# EAGLE board M_3x4._v1brd (EAGLE 9.6.2)
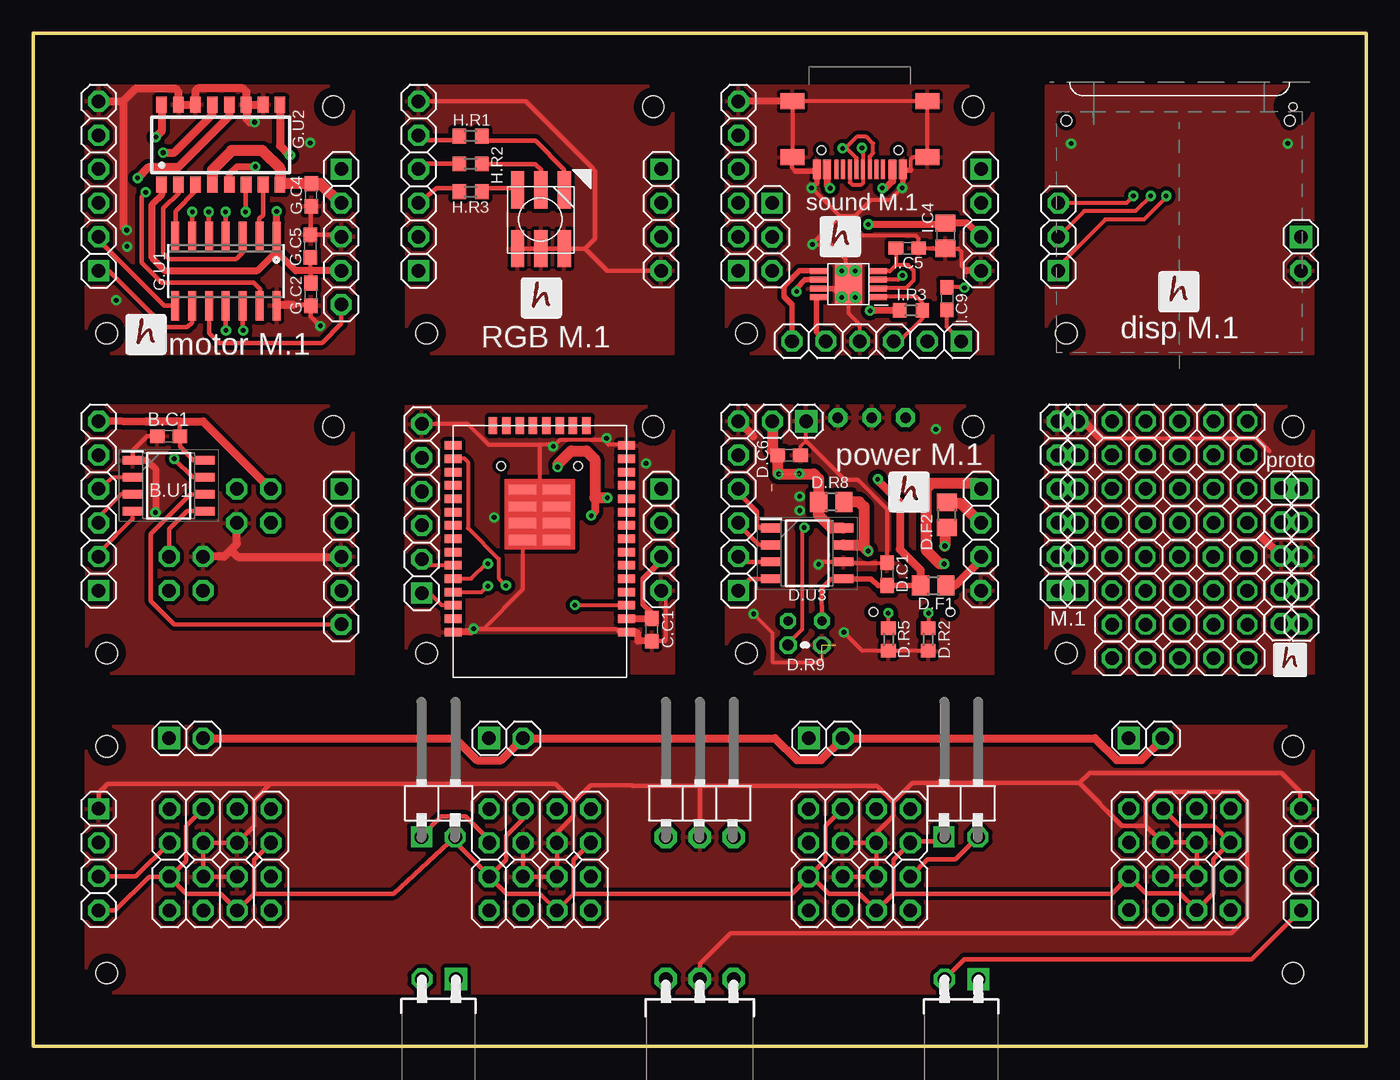
[diagram p0: board, top side]
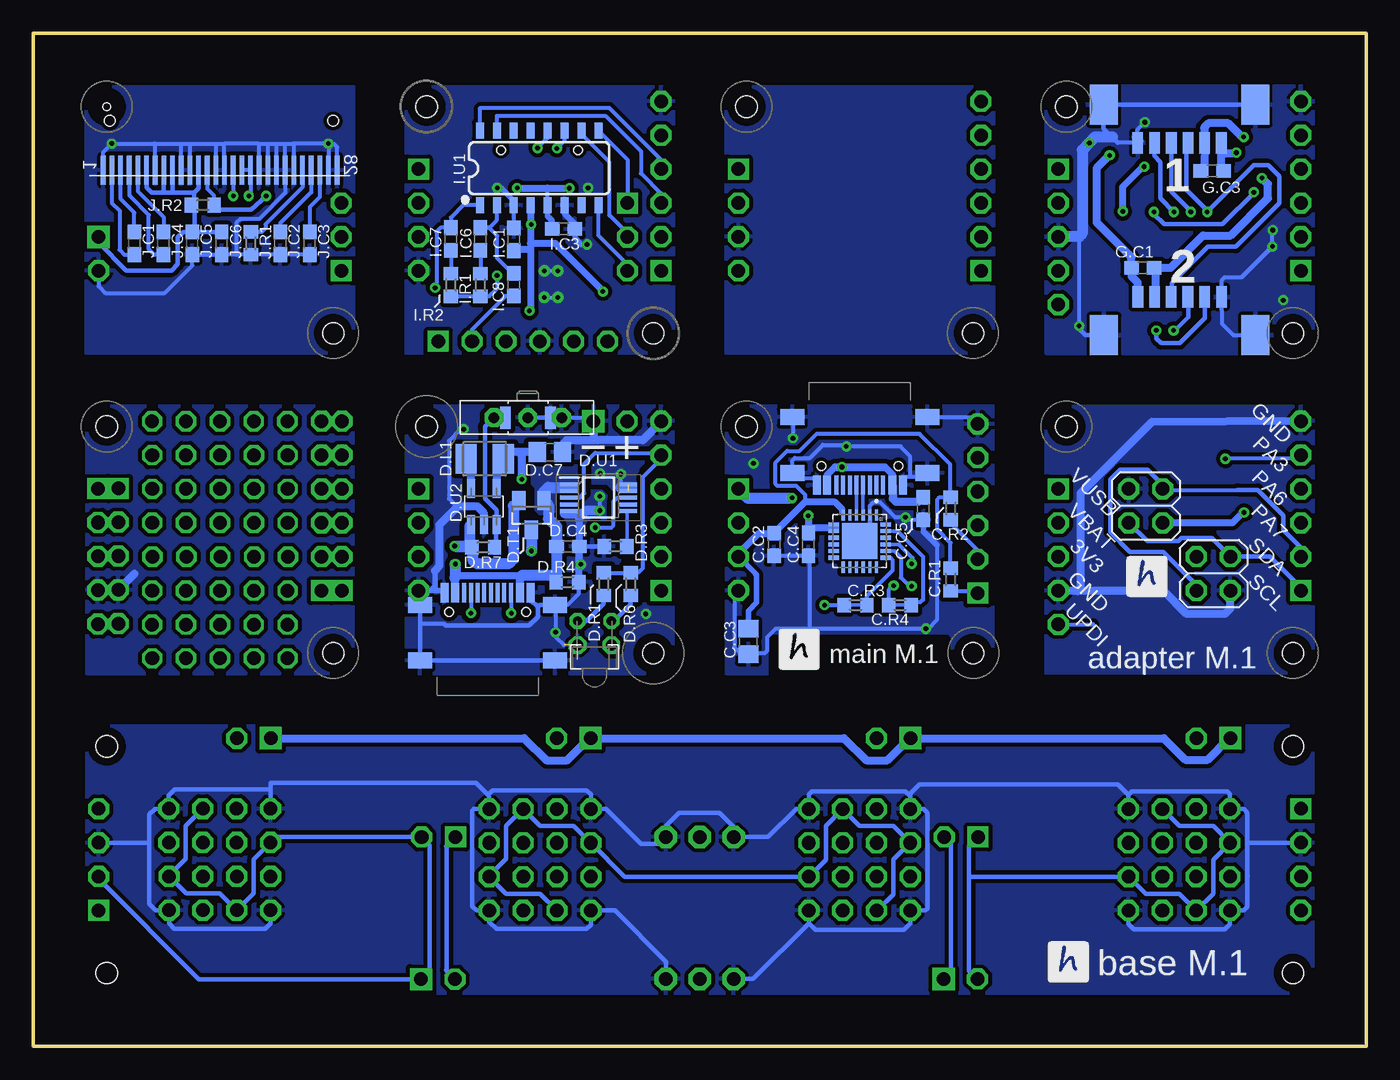
[diagram p1: board, bottom side, seen from below]

Size 100 x 76 mm. Coordinates in mm from the lower left corner, seen from the top.
Outline: 0,0 100,0 100,76 0,76 0,0
Copper layers (1*16): Top 0.035mm / dielectric 1.5mm / Bottom 0.035mm
Design rules "default *": minimum track width 10mil, minimum drill 0.35mm, track to track 6mil, track to pad 6mil, pad to pad 6mil, via to via 6mil, smd to smd 6mil, copper to edge 0mil, drill to drill 15mil, minimum pad ring 10mil, minimum via ring 8mil, stop-mask expansion 4mil, vias tented up to drill 0mil, thermal gap 10mil
Holes 1.6 mm at 94.5,5.5 94.5,22.5 5.5,22.5 5.5,5.5 5.5,29.5 22.5,46.5 94.5,46.5 77.5,29.5 5.5,53.5 22.5,70.5 29.5,53.5 46.5,70.5 53.5,53.5 70.5,70.5 77.5,53.5 29.5,29.5 46.5,46.5 53.5,29.5 70.5,46.5
Holes 0.6 mm at 94.5,70.5
tRestrict: area 4.5,52.5 to 6.5,54.5; area 21.5,69.5 to 23.5,71.5; area 28.5,52.5 to 30.5,54.5; area 45.5,69.5 to 47.5,71.5; area 52.5,52.5 to 54.5,54.5; area 69.5,69.5 to 71.5,71.5; area 76.5,52.5 to 78.5,54.5; area 93.5,69.5 to 95.5,71.5; area 4.5,28.5 to 6.5,30.5; area 21.5,45.5 to 23.5,47.5; area 76.5,28.5 to 78.5,30.5; area 93.5,45.5 to 95.5,47.5; 8 more areas
bRestrict: area 4.5,52.5 to 6.5,54.5; area 21.5,69.5 to 23.5,71.5; area 28.5,52.5 to 30.5,54.5; area 45.5,69.5 to 47.5,71.5; area 52.5,52.5 to 54.5,54.5; area 69.5,69.5 to 71.5,71.5; area 76.5,52.5 to 78.5,54.5; area 93.5,69.5 to 95.5,71.5; area 4.5,28.5 to 6.5,30.5; area 21.5,45.5 to 23.5,47.5; area 76.5,28.5 to 78.5,30.5; area 93.5,45.5 to 95.5,47.5; 8 more areas

## Footprints (pad centres in the part's own frame; a part is rotated, then mirrored left to right if it is on the bottom)
2X04 = drill 1.016 pad 1.575 octagon: 1 -3.81,-1.27; 2 -3.81,1.27; 3 -1.27,-1.27; 4 -1.27,1.27; 5 1.27,-1.27; 6 1.27,1.27; 7 3.81,-1.27; 8 3.81,1.27
1X02/90 = drill 1.016 pad 1.575 square: 1 -1.27,-3.81 | drill 1.016 pad 1.575 octagon: 2 1.27,-3.81
1X03/90 = drill 1.016 pad 1.676 octagon: 1 -2.54,-3.81; 2 0,-3.81; 3 2.54,-3.81
1X03/90F = drill 1.016 pad 1.676 octagon: 1 -2.54,0; 2 0,0; 3 2.54,0
1X02/90F = drill 1.016 pad 1.676 square: 1 -1.31,0 | drill 1.016 pad 1.575 octagon: 2 1.23,0
1X04 = drill 1.016 pad 1.575 square: 1 -3.81,0 | drill 1.016 pad 1.575 octagon: 2 -1.27,0; 3 1.27,0; 4 3.81,0
C0603 = smd 1.1 x 1: 1 -0.85,0; 2 0.85,0
1X06 = drill 1.016 pad 1.575 square: 1 -6.35,0 | drill 1.016 pad 1.575 octagon: 2 -3.81,0; 3 -1.27,0; 4 1.27,0; 5 3.81,0; 6 6.35,0
2X02 = drill 1.016 pad 1.575 octagon: 1 -1.27,-1.27; 2 -1.27,1.27; 3 1.27,-1.27; 4 1.27,1.27
1X05 = drill 1.016 pad 1.575 square: 1 -5.08,0 | drill 1.016 pad 1.575 octagon: 2 -2.54,0; 3 0,0; 4 2.54,0; 5 5.08,0
SOIC127P600X175-8N = smd 1.5 x 0.65: 1 -2.7,1.905; 2 -2.7,0.635; 3 -2.7,-0.635; 4 -2.7,-1.905; 5 2.7,-1.905; 6 2.7,-0.635; 7 2.7,0.635; 8 2.7,1.905
C0805 = smd 1.3 x 1.5: 1 -0.95,0; 2 0.95,0
R0603 = smd 1 x 1.1: 1 -0.85,0; 2 0.85,0
TTGO-MICRO-32 = smd 1.27 x 0.635: 3V3 -6.5,5; EN -6.5,4; GND1 -6.5,6; GND2 -6.5,-8; GND3 6.5,6; IO0 6.5,-7; IO2 6.5,-8; IO4 6.5,-6; IO5 6.5,-3; IO12 -6.5,-7; IO14 -6.5,-6; IO16 6.5,-5; IO17 6.5,-4; IO18 6.5,-2; IO19 6.5,-1; IO21 6.5,1; IO22 6.5,4; IO23 6.5,5; IO25 -6.5,-3; IO26 -6.5,-4; IO27 -6.5,-5; IO32 -6.5,-1; IO33 -6.5,-2; IO34 -6.5,1; IO35 -6.5,0; NC 6.5,0; RXD0 6.5,2; TXD0 6.5,3; VN -6.5,2; VP -6.5,3 | smd 0.635 x 1.27: CLK 0.5,-9.5; CMD -0.5,-9.5; IO13 -3.5,-9.5; IO15 3.5,-9.5; SD0 1.5,-9.5; SD1 2.5,-9.5; SD2 -2.5,-9.5; SD3 -1.5,-9.5 | smd 2.032 x 0.762: GND4 -1.27,-0.889; GND5 1.27,-0.889; GND6 -1.27,-2.159; GND7 1.27,-2.159; GND8 -1.27,-3.429; GND9 -1.27,-4.699; GND10 1.27,-3.429; GND11 1.27,-4.699
LED_1.8 = drill 0.7 octagon: 1 -1.27,-0.4; 2 1.27,-0.4
R0805 = smd 1.3 x 1.5: 1 -0.95,0; 2 0.95,0
L3230M = smd 1.6 x 2.2: 1 -1.4,0; 2 1.4,0
1X02 = drill 1.016 pad 1.676 square: 1 -1.27,0 | drill 1.016 pad 1.575 octagon: 2 1.27,0
SWITCH = drill 0.8 pad 1.422 octagon: P$1 -2.54,0; P$2 0,0; P$3 2.54,0 | smd 0.8 x 1.7: P$4 -1.7,0; P$5 1.7,0
THERM = drill 0.813 octagon: 1 -1.27,0; 2 1.27,0
SOT23 = smd 1 x 1.4: D 0,1.1; G -0.95,-1.1; S 0.95,-1.1
SOP50P490X110-10N = smd 1.4 x 0.3: 1 -2.2,1; 2 -2.2,0.5; 3 -2.2,0; 4 -2.2,-0.5; 5 -2.2,-1; 6 2.2,-1; 7 2.2,-0.5; 8 2.2,0; 9 2.2,0.5; 10 2.2,1
SOT32-5 = smd 0.6 x 1.4: BP 0.95,1.35; GND 0,-1.35; SHDN 0.95,-1.35; VIN -0.95,-1.35; VOUT -0.95,1.35
SOIC127P600X175-8N' = smd 1.528 x 0.65: 1 -2.711,1.905; 2 -2.711,0.635; 3 -2.711,-0.635; 4 -2.711,-1.905; 5 2.711,-1.905; 6 2.711,-0.635; 7 2.711,0.635; 8 2.711,1.905
A1250WR-6 = smd 0.8 x 1.6: 1 -3.128,2.54; 2 -1.878,2.54; 3 -0.628,2.54; 4 0.622,2.54; 5 1.872,2.54; 6 3.142,2.54 | smd 2.1 x 3: $1 -5.678,-0.34; $2 5.682,-0.34
SO14 = smd 0.6 x 2.2: 1 -3.81,-2.6; 2 -2.54,-2.6; 3 -1.27,-2.6; 4 0,-2.6; 5 1.27,-2.6; 6 2.54,-2.6; 7 3.81,-2.6; 8 3.81,2.6; 9 2.54,2.6; 10 1.27,2.6; 11 0,2.6; 12 -1.27,2.6; 13 -2.54,2.6; 14 -3.81,2.6
SOP16 = smd 0.8 x 1.2: 1 -4.445,-3; 2 -3.175,-3; 3 -1.905,-3; 4 -0.635,-3; 5 0.635,-3; 6 1.905,-3; 7 3.175,-3; 8 4.445,-3; 9 4.445,3; 10 3.175,3; 11 1.905,3; 12 0.635,3; 13 -0.635,3; 14 -1.905,3; 15 -3.175,3; 16 -4.445,3
RGB_WW-FCE50TC-Q1 = smd 1 x 2.8: 1 -1.778,-2.286; 2 -0.028,-2.286; 3 1.722,-2.286; 4 -1.778,2.114; 5 -0.028,2.114; 6 1.722,2.114
1X03 = drill 1.016 pad 1.575 square: 1 -2.54,0 | drill 1.016 pad 1.575 octagon: 2 0,0; 3 2.54,0
SSD_1306_STM32_OLED = smd 0.35 x 2.2 bottom: P$1 0,-0.4; P$2 0.65,-0.4; P$3 1.3,-0.4; P$4 1.95,-0.4; P$5 2.6,-0.4; P$6 3.25,-0.4; P$7 3.9,-0.4; P$8 4.55,-0.4; P$9 5.2,-0.4; P$10 5.85,-0.4; P$11 6.5,-0.4; P$12 7.15,-0.4; P$13 7.8,-0.4; P$14 8.45,-0.4; P$15 9.1,-0.4; P$16 9.75,-0.4; P$17 10.4,-0.4; P$18 11.05,-0.4; P$19 11.7,-0.4; P$20 12.35,-0.4; P$21 13,-0.4; P$22 13.65,-0.4; P$23 14.3,-0.4; P$24 14.95,-0.4; P$25 15.6,-0.4; P$26 16.25,-0.4; P$27 16.9,-0.4; P$28 17.55,-0.4 | hole 0.8: 0.5,-4.1; 17.25,-4.1
SO16 = smd 0.6 x 1.2: 1 -4.445,-2.8; 2 -3.175,-2.8; 3 -1.905,-2.8; 4 -0.635,-2.8; 5 0.635,-2.8; 6 1.905,-2.8; 7 3.175,-2.8; 8 4.445,-2.8; 9 4.445,2.8; 10 3.175,2.8; 11 1.905,2.8; 12 0.635,2.8; 13 -0.635,2.8; 14 -1.905,2.8; 15 -3.175,2.8; 16 -4.445,2.8
MSOP-POWERPAD-8 = smd 1.4 x 0.45: 1 -2.184,0.959; 2 -2.184,0.309; 3 -2.184,-0.341; 4 -2.184,-0.991; 5 2.216,-0.991; 6 2.216,-0.341; 7 2.216,0.309; 8 2.216,0.959 | smd 2 x 3: 9 0.016,-0.016 | drill 0.35: P$10 -0.484,-1.016; P$11 0.516,-1.016; P$12 0.516,0.984; P$13 -0.484,0.984
USB-C = smd 0.6 x 1.45: A1B12 -3.235,3.825; A4B9 -2.46,3.825; B1A12 3.215,3.825; B4A9 2.44,3.825 | smd 0.3 x 1.45: A5 -1.26,3.825; A6 -0.26,3.825; A7 0.24,3.825; A8 1.24,3.825; B5 1.74,3.825; B6 0.74,3.825; B7 -0.76,3.825; B8 -1.76,3.825 | smd 1.8 x 1.2: SH1 -5.08,2.91; SH2 -5.08,-1.27; SH3 5.06,-1.27; SH4 5.06,2.91 | hole 0.65: 2.88,2.38; -2.9,2.38
QFN50P400X400X80-25N = smd 0.81 x 0.26: 1 -1.955,1.25; 2 -1.955,0.75; 3 -1.955,0.25; 4 -1.955,-0.25; 5 -1.955,-0.75; 6 -1.955,-1.25; 13 1.955,-1.25; 14 1.955,-0.75; 15 1.955,-0.25; 16 1.955,0.25; 17 1.955,0.75; 18 1.955,1.25 | smd 0.26 x 0.81: 7 -1.25,-1.955; 8 -0.75,-1.955; 9 -0.25,-1.955; 10 0.25,-1.955; 11 0.75,-1.955; 12 1.25,-1.955; 19 1.25,1.955; 20 0.75,1.955; 21 0.25,1.955; 22 -0.25,1.955; 23 -0.75,1.955; 24 -1.25,1.955 | smd 2.68 x 2.68: 25 0,0
1X5_AUTO = drill 1.016 octagon: 1 -5.08,0; 2 -2.54,0; 3 0,0; 4 2.54,0; 5 5.08,0

## Placement (x,y rotation side)
A.J1  [2X04]  14.02,16.53 180 top
A.J2  [2X04]  14.02,11.45 180 top
A.J3  [2X04]  38.01,16.53 180 top
A.J4  [2X04]  38.01,11.45 180 top
A.J5  [2X04]  61.98,16.53 180 top
A.J6  [2X04]  61.98,11.45 180 top
A.J7  [1X02/90]  30.39,19.5 0 top
A.J8  [1X03/90]  50,19.5 0 top
A.J9  [1X03/90F]  50,5.04 180 top
A.J10  [1X02/90F]  30.39,5.04 180 top
A.J11  [2X04]  86.01,11.47 0 top
A.J12  [2X04]  86.02,16.55 0 top
A.J13  [1X02/90F]  69.6,5.02 180 top
A.J14  [1X02/90]  69.6,19.5 0 top
A.J15  [1X04]  4.9,14 270 top
A.J16  [1X04]  95.1,14 90 top
B.C1  100n  [C0603]  10.15,45.76 0 top
B.J2  [1X06]  4.9,40.54 90 top
B.J4  [2X02]  16.54,40.54 270 bottom
B.J5  [1X05]  23.1,36.73 270 top
B.U1  AT412  [SOIC127P600X175-8N]  10.16,42.05 0 top
C.C1  100n  [C0603]  46.41,31.24 270 top
C.C2  100n  [C0603]  44.42,37.65 270 bottom
C.C3  22u  [C0805]  46.35,30.36 270 bottom
C.C4  100n  [C0603]  41.85,37.66 90 bottom
C.C5  10u  [C0603]  33.23,40.34 90 bottom
C.J2  [1X06]  29.14,40.35 90 top
C.R1  2k2  [R0603]  31.18,35.01 90 bottom
C.R2  2k2  [R0603]  31.16,40.34 90 bottom
C.R3  0  [R0603]  38.31,33.1 0 bottom
C.R4  0  [R0603]  34.98,33.1 180 bottom
C.U1  TTGO-MICRO-32  [TTGO-MICRO-32]  37.99,37.08 180 top
D.C1  100n  [C0603]  64.05,35.42 270 top
D.C4  4u7  [C0603]  59.89,37.5 180 bottom
D.C6  4u7  [C0603]  56.71,44.35 180 top
D.C7  22u  [C0805]  61.24,44.58 180 bottom
D.D1  LED_1.8  [LED_1.8]  57.9,31.51 180 bottom
D.F1  [R0805]  67.52,34.58 0 top
D.F2  [R0805]  68.53,39.87 90 top
D.J2  [1X06]  52.9,40.54 90 top
D.J3  [1X04]  71.1,38 270 top
D.L1  2u2  [L3230M]  66.13,44.09 0 bottom
D.LIPOL  [1X02]  56.71,46.89 180 top
D.ON/OFF/RESET  SWITCH  [SWITCH]  62.9,47.16 0 bottom
D.R1  100k  [R0603]  57.21,34.67 90 bottom
D.R2  5k1  [R0603]  67.15,30.52 270 top
D.R3  1k  [R0603]  56.32,37.5 0 bottom
D.R4  100k  [R0603]  59.93,34.82 180 bottom
D.R5  5k1  [R0603]  64.16,30.52 270 top
D.R6  2k2  [R0603]  55.18,34.66 270 bottom
D.R7  100k  [R0603]  66.25,37.43 0 bottom
D.R8  0.1  [R0805]  59.87,40.84 180 top
D.R9  TERM_10K  [THERM]  57.9,30.1 180 top
D.T1  FDV  [SOT23]  62.63,39.84 180 bottom
D.U1  MCP73833-AMI_UN  [SOP50P490X110-10N]  57.6,41.16 0 bottom
D.U2  LM3671_3.3  [SOT32-5]  66.19,40.5 0 bottom
D.U3  INA219AIDR  [SOIC127P600X175-8N']  58.05,36.97 0 top
G.C1  100n  [C0603]  16.76,58.41 180 bottom
G.C2  100n  [C0603]  20.82,56.4 90 top
G.C3  100n  [C0603]  11.55,65.67 0 bottom
G.C4  4u7  [C0603]  20.86,63.87 90 top
G.C5  4u7  [C0603]  20.79,60.04 270 top
G.J1  [1X06]  4.9,64.54 90 top
G.J2  [1X05]  23.1,60.73 270 top
G.J3  A1250WR-6  [A1250WR-6]  14,53.68 0 bottom
G.MOTO1  A1250WR-6  [A1250WR-6]  14,70.32 180 bottom
G.U1  AT414  [SO14]  14.45,58.15 180 top
G.U2  MX1508  [SOP16]  14.07,67.63 0 top
H.D1  RGB_WW-FCE50TC-Q1  [RGB_WW-FCE50TC-Q1]  38.05,61.95 180 top
H.J2  [1X06]  28.9,64.54 90 top
H.J4  [1X06]  63.27,52.9 180 top
H.R1  82  [R0603]  32.8,68.28 0 top
H.R2  82  [R0603]  32.8,66.2 0 top
H.R3  82  [R0603]  32.8,64.11 0 top
I.C1  100n  [C0603]  63.95,60.55 90 bottom
I.C3  1u  [C0603]  60.22,61.31 0 bottom
I.C4  10u (22u)  [C0805]  68.44,60.81 90 top
I.C5  100n  [C0603]  65.57,59.88 180 top
I.C6  100n  [C0603]  66.46,60.57 270 bottom
I.C7  100n  [C0603]  68.67,60.57 270 bottom
I.C8  100n  [C0603]  63.95,57.14 270 bottom
I.C9  100n  [C0603]  68.54,56.1 270 top
I.J1  [1X03]  55.44,60.72 270 top
I.J2  [1X06]  52.9,64.54 90 top
I.J3  [1X04]  71.1,62 270 top
I.J4  SSD_1306_STM32_OLED  [SSD_1306_STM32_OLED]  94.75,65.33 180 top
I.J5  [1X02]  95.1,59.46 270 top
I.R1  100k  [R0603]  66.46,57.11 270 bottom
I.R2  100k  [R0603]  68.67,57.11 270 bottom
I.R3  10k  [R0603]  65.85,55.21 180 top
I.U1  WT2003S  [SO16]  62.05,65.89 0 bottom
I.U2  TPA6211  [MSOP-POWERPAD-8]  61.18,57.16 180 top
I.USB  USB-C  [USB-C]  62,69.62 180 top
J.C1  1u  [C0603]  92.42,60.24 270 bottom
J.C2  2u2  [C0603]  81.47,60.24 90 bottom
J.C3  2u  [C0603]  79.26,60.24 90 bottom
J.C4  1u  [C0603]  90.23,60.24 270 bottom
J.C5  2u2  [C0603]  88.07,60.24 90 bottom
J.C6  100n  [C0603]  85.86,60.24 90 bottom
J.J1  [1X03]  76.9,60.73 90 top
J.R1  390  [R0603]  83.68,60.24 90 bottom
J.R2  100k  [R0603]  87.29,63.11 180 bottom
JB3  [2X02]  11.46,35.46 270 bottom
JP1  [1X02]  11.46,23.1 0 top
JP2  [1X02]  35.46,23.1 0 top
JP3  [1X02]  59.46,23.1 0 top
JP4  [1X02]  83.46,23.1 0 top
JP5  [1X04]  47.1,38 270 top
JP6  [1X06]  76.85,40.54 90 top
JP7  [1X06]  78.37,40.54 90 top
JP8  [1X05]  93.63,36.78 270 top
JP9  [1X04]  47.1,62 270 top
JP11  [1X05]  95.15,36.76 270 top
U1  CP2104-F03-GM  [QFN50P400X400X80-25N]  37.99,37.9 270 bottom
U$1  USB-C  [USB-C]  38,45.93 180 bottom
U$2  USB-C  [USB-C]  65.91,30.2 0 bottom
U$3  PINHD-1X5_AUTO  [1X5_AUTO]  86.01,46.89 0 top
U$4  PINHD-1X5_AUTO  [1X5_AUTO]  86,44.35 0 top
U$5  PINHD-1X5_AUTO  [1X5_AUTO]  86,41.81 0 top
U$6  PINHD-1X5_AUTO  [1X5_AUTO]  86,39.27 0 top
U$7  PINHD-1X5_AUTO  [1X5_AUTO]  85.97,36.73 0 top
U$8  PINHD-1X5_AUTO  [1X5_AUTO]  86,34.19 0 top
U$9  PINHD-1X5_AUTO  [1X5_AUTO]  86,31.64 0 top
U$10  PINHD-1X5_AUTO  [1X5_AUTO]  86,29.1 0 top

## Library data of the parts
A.J1-A.J16 B.J2 B.J4 B.J5 C.J2 D.J2 D.J3 D.LIPOL G.J1 G.J2 H.J2 H.J4 I.J1-I.J3 I.J5 J.J1 JB3 JP1-JP9 JP11 U$3-U$10 = pinhead2
B.C1 C.C1-C.C5 D.C1 D.C4 D.C6 D.C7 G.C1-G.C5 I.C1 I.C3-I.C9 J.C1-J.C6 = rcl; SPICEPREFIX: C
B.U1 = ATTINY412-SSN; DESCRIPTION: 8-bit Microcontrollers - MCU 20MHz, 4KB, SOIC8, Ind 105C, Green, Tube; HEIGHT: 1.75mm; MANUFACTURER_NAME: Microchip; MANUFACTURER_PART_NUMBER: ATTINY412-SSN; MOUSER_PART_NUMBER: 579-ATTINY412-SSN; MOUSER_PRICE-STOCK: https://www.mouser.co.uk/ProductDetail/Microchip-Technology/ATTINY412-SSN?qs=3HJ2avRr9PItQG9ZsCamPQ%3D%3D
C.R1-C.R4 D.F1 D.F2 D.R1-D.R8 I.R1-I.R3 J.R1 J.R2 = rcl; SPICEPREFIX: R
C.U1 D.D1 D.ON/OFF/RESET D.R9 G.J3 G.MOTO1 G.U2 H.D1 I.J4 I.U2 I.USB U$1 U$2 = hugo
D.L1 = rcl; SPICEPREFIX: L
D.T1 D.U2 = !stavebnice03
D.U1 = SamacSys_Parts; DESCRIPTION: Microchip MCP73833-AMI/UN, Battery Charge Controller Lithium-Ion, Lithium-Polymer, 10-Pin MSOP; HEIGHT: 1.1mm; MANUFACTURER_NAME: Microchip; MANUFACTURER_PART_NUMBER: MCP73833-AMI/UN; MOUSER_PART_NUMBER: 579-MCP73833-AMI/UN; MOUSER_PRICE-STOCK: https://www.mouser.co.uk/ProductDetail/Microchip-Technology/MCP73833-AMI-UN?qs=Fxu3fLyJv8fd%2FGnsUSC9lg%3D%3D
D.U3 = SamacSys_Parts; DESCRIPTION: 26-V, Bidirectional, Zero-Drift, High-Side, I2C Out Current/Power Monitor; HEIGHT: 1.75mm; MANUFACTURER_NAME: Texas Instruments; MANUFACTURER_PART_NUMBER: INA219AIDR; MOUSER_PART_NUMBER: 595-INA219AIDR; MOUSER_PRICE-STOCK: https://www.mouser.co.uk/ProductDetail/Texas-Instruments/INA219AIDR?qs=XGzIaZb%2FFYIE5YcOHTnKDA%3D%3D
G.U1 = atmel
H.R1-H.R3 = resistor
I.U1 = WT2003S
U1 = CP2104; AVAILABILITY: Unavailable; DESCRIPTION: USB Bridge, USB to UART USB 2.0 UART Interface 24-QFN (4x4); MF: Silicon Labs; MP: CP2104; PACKAGE: QFN-24 Silicon Labs; PRICE: None

## Nets
3V3: B.C1.1 B.J4.4 B.J5.3 B.U1.1 JB3.1
3V3F: D.F1.2 D.J3.3
DCMD: I.J1.2 I.U1.10
FOTOA1: G.MOTO1.5 G.U1.4
FOTOA2: G.J3.5 G.U1.12
FOTOB1: G.MOTO1.4 G.U1.5
FOTOB2: G.J3.4 G.U1.11
GND: A.J1.1 A.J1.7 A.J2.2 A.J2.8 A.J3.1 A.J3.7 A.J4.2 A.J4.8 A.J5.1 A.J5.7 A.J6.2 A.J6.8 A.J8.1 A.J8.3 A.J9.1 A.J9.3 A.J11.1 A.J11.7 A.J12.2 A.J12.8 A.J15.2 A.J16.3
GND1: B.C1.2 B.J2.6 B.J4.1 B.J5.4 B.U1.8 JB3.4
GND2: C.C1.2 C.C2.2 C.C3.2 C.C4.1 C.C5.1 C.J2.6 C.U1.GND1 C.U1.GND2 C.U1.GND3 C.U1.GND4 C.U1.GND5 C.U1.GND6 C.U1.GND7 C.U1.GND8 C.U1.GND9 C.U1.GND10 C.U1.GND11 JP5.4 U1.2 U1.25 U$1.A1B12 U$1.B1A12 U$1.SH1 U$1.SH2 U$1.SH3 U$1.SH4
GND3: D.C1.1 D.C4.1 D.C6.1 D.C7.1 D.J2.6 D.J3.4 D.LIPOL.1 D.ON/OFF/RESET.P$2 D.ON/OFF/RESET.P$3 D.ON/OFF/RESET.P$5 D.R2.2 D.R3.1 D.R4.1 D.R5.2 D.R9.1 D.U1.5 D.U2.GND D.U3.6 U$2.A1B12 U$2.B1A12 U$2.SH1 U$2.SH2 U$2.SH3 U$2.SH4
GND4: JP6.6 JP7.6 JP8.3 JP11.3
GND5: G.C2.1 G.C4.1 G.C5.1 G.J1.6 G.J2.3 G.J3.6 G.J3.$1 G.J3.$2 G.MOTO1.6 G.MOTO1.$1 G.MOTO1.$2 G.U1.14 G.U2.10 G.U2.11 G.U2.14 G.U2.15
GND6: H.D1.4 H.D1.5 H.D1.6 H.J2.6 JP9.4
GND7: H.J4.4 I.C1.2 I.C3.2 I.C4.1 I.C5.1 I.J2.6 I.J3.4 I.U1.3 I.U1.6 I.U2.7 I.U2.9 I.U2.P$10 I.U2.P$11 I.U2.P$12 I.U2.P$13 I.USB.A1B12 I.USB.B1A12 I.USB.SH1 I.USB.SH2 I.USB.SH3 I.USB.SH4
GND8: I.J4.P$1 I.J4.P$7 I.J4.P$10 I.J4.P$11 I.J4.P$14 I.J4.P$15 I.J4.P$19 I.J4.P$20 I.J4.P$21 I.J4.P$22 I.J4.P$23 I.J4.P$27 I.J4.P$28 I.J5.2 J.C2.1 J.C3.1 J.C5.1 J.C6.1 J.R1.1
IN+: D.C6.2 D.LIPOL.2 D.R8.2 D.U1.9 D.U1.10 D.U3.8
IN-: D.R8.1 D.T1.D D.U3.7
INA1: G.U1.3 G.U2.2
INA2: G.U1.13 G.U2.6
INB1: G.U1.7 G.U2.3
INB2: G.U1.2 G.U2.7
M_V: G.C4.2 G.J2.2 G.U2.4 G.U2.8
MA1: G.C3.1 G.MOTO1.2 G.U2.16
MA2: G.C1.1 G.J3.2 G.U2.12
MB1: G.C3.2 G.MOTO1.1 G.U2.13
MB2: G.C1.2 G.J3.1 G.U2.9
N$1: U1.4 U$1.A7
N$2: U1.3 U$1.A6
N$3: D.L1.1 D.U2.VOUT
N$4: D.D1.1 D.R6.2
N$5: D.ON/OFF/RESET.P$1 D.ON/OFF/RESET.P$4 D.R7.2 D.U2.SHDN
N$6: D.R5.1 U$2.B5
N$7: D.R2.1 U$2.A5
N$8: D.R3.2 D.U1.6
N$10: D.R9.2 D.U1.8
N$12: JP6.5 JP7.5
N$14: JP6.4 JP7.4
N$15: JP6.3 JP7.3
N$16: JP6.2 JP7.2
N$17: JP6.1 JP7.1
N$18: JP8.5 JP11.5
N$19: JP8.2 JP11.2
N$20: JP8.1 JP11.1
N$21: H.D1.2 H.R2.2
N$22: H.D1.1 H.R1.2
N$23: H.D1.3 H.R3.2
N$24: H.J2.5 H.R1.1
N$25: H.J2.4 H.R2.1
N$26: H.J2.3 H.R3.1
N$27: I.J2.4 I.U1.16
N$28: I.J2.3 I.U1.15
N$29: I.U1.12 I.USB.A6 I.USB.B6
N$30: I.U1.11 I.USB.A7 I.USB.B7
N$31: I.C3.1 I.U1.5 I.USB.A4B9 I.USB.B4A9
N$32: I.C6.1 I.C8.1 I.U1.2
N$33: I.C7.1 I.C9.1 I.U1.1
N$34: I.C5.2 I.U2.2 I.U2.4
N$35: I.R1.2 I.R2.2 I.U2.3
N$36: I.C6.2 I.R1.1
N$37: I.C7.2 I.R2.1
N$38: I.J4.P$24 J.R1.2
N$39: I.J4.P$25 J.C2.2
N$40: I.J4.P$2 J.C1.2
N$41: I.J4.P$3 J.C1.1
N$42: I.J4.P$4 J.C4.2
N$43: I.J4.P$5 J.C4.1
N$44: I.J4.P$26 J.C3.2
P0: D.J2.4 D.U3.1
P1: D.J2.3 D.U3.2
P4: D.J2.5 D.R1.2 D.R6.1 D.U1.3
PA1: I.J4.P$13 J.J1.3 J.R2.1
PA3: B.J2.5 B.U1.7
PA6: B.J2.4 B.U1.2
PA7: B.J2.3 B.U1.3
POWER: G.J3.3 G.MOTO1.3 G.U1.6
PROG: C.R4.1 C.R4.2 C.U1.IO0 U1.23
RESET: C.R3.1 C.R3.2 C.U1.EN U1.19
RX: C.U1.TXD0 U1.20
SCL: A.J1.2 A.J1.5 A.J2.4 A.J2.7 A.J3.2 A.J3.5 A.J4.4 A.J4.7 A.J5.2 A.J5.5 A.J6.4 A.J6.7 A.J7.2 A.J10.1 A.J11.2 A.J11.5 A.J12.4 A.J12.7 A.J13.2 A.J14.1 A.J15.4 A.J16.1
SCL1: B.J2.1 B.J4.3 B.U1.5 JB3.2
SCL2: C.J2.1 C.R1.1 C.U1.IO22
SCL3: D.J2.1 D.U3.4
SCL4: G.J1.1 G.U1.9
SCL5: I.J4.P$16 J.J1.1
SDA: A.J1.3 A.J1.8 A.J2.1 A.J2.6 A.J3.3 A.J3.8 A.J4.1 A.J4.6 A.J5.3 A.J5.8 A.J6.1 A.J6.6 A.J7.1 A.J10.2 A.J11.3 A.J11.8 A.J12.1 A.J12.6 A.J13.1 A.J14.2 A.J15.3 A.J16.2
SDA1: B.J2.2 B.J4.2 B.U1.4 JB3.3
SDA2: C.J2.2 C.R2.1 C.U1.IO21
SDA3: D.J2.2 D.U3.3
SDA4: G.J1.2 G.U1.8
SDA5: I.J4.P$17 I.J4.P$18 J.J1.2
SDCLK: I.J1.1 I.U1.9
SDDAT: I.J1.3 I.U1.8
SHTDOWN: H.J4.3 I.R3.1 I.U2.1
TX: C.U1.RXD0 U1.21
UPDI: B.J5.5 B.U1.6
UPDI1: G.J2.5 G.U1.10
VBAT: JP1.2 JP2.2 JP3.2 JP4.2
VBATF: D.F2.2 D.J3.2
VCC: A.J1.4 A.J1.6 A.J2.3 A.J2.5 A.J3.4 A.J3.6 A.J4.3 A.J4.5 A.J5.4 A.J5.6 A.J6.3 A.J6.5 A.J8.2 A.J9.2 A.J11.4 A.J11.6 A.J12.3 A.J12.5 A.J15.1 A.J16.4
VCC1: C.C1.1 C.C2.1 C.C3.1 C.R1.2 C.R2.2 C.U1.3V3 JP5.3 U1.6
VCC2: G.C2.2 G.C5.2 G.J2.4 G.U1.1 G.U2.1 G.U2.5
VCC3: I.C1.1 I.C4.2 I.J3.3 I.R3.2 I.U1.4 I.U2.6
VCC4: D.C1.2 D.C7.2 D.D1.2 D.F1.1 D.L1.2 D.R1.1 D.U2.BP D.U3.5
VDD1: JP8.4 JP11.4
VDD2: JP9.3
VDD3: I.J4.P$6 I.J4.P$8 I.J4.P$9 I.J4.P$12 I.J5.1 J.C5.2 J.C6.2 J.R2.2
VIO: U1.5
VMOT: D.F2.1 D.R7.1 D.T1.S D.U2.VIN
VO+: H.J4.6 I.U2.5
VO-: H.J4.5 I.U2.8
VOUTL: H.J4.1 I.C9.2
VOUTR: H.J4.2 I.C8.2
VUSB: JP1.1 JP2.1 JP3.1 JP4.1
VUSB1: C.C4.2 C.C5.2 JP5.1 U1.7 U1.8 U$1.A4B9 U$1.B4A9
VUSB2: D.C4.2 D.J3.1 D.R4.2 D.T1.G D.U1.1 D.U1.2 U$2.A4B9 U$2.B4A9

## Tracks (layer width: path | path; a pad name or v marks a point on that pad's centre or on a via)
3V3  (via drill 0.35)
  Top 0.356: B.U1.1 7.46,44.7 8.53,45.76 B.C1.1
  Top 0.508: v9.16,40.05 9.16,43.3 8.5,43.96 B.U1.1
  Top 0.61: 14.82,37.24 15.34,36.72 B.J5.3 | JB3.1 14.3,36.73 14.82,37.24 | B.J4.4 15.27,37.7 14.82,37.24
  Bottom 0.508: v9.16,40.05 9.25,40.05 10.04,39.27 B.J4.4
  Bottom 0.61: B.J5.3
  pour Top (isolate 0.305): 4,48 4,28 24,28 24,48
3V3F
  Top 0.61: D.F1.2 69.18,34.58 71.1,36.5 D.J3.3
DCMD
  Bottom 0.305: I.U1.10 58.87,68.42 56.78,66.33 56.78,62.34 55.44,61 I.J1.2
FOTOA1  (via drill 0.35)
  Top 0.356: G.U1.4 14.42,60.78 14.42,62.55 14.46,62.58 v14.42,62.6
  Bottom 0.356: G.MOTO1.5 15.9,66.81 15.44,66.34 15.44,63.64 v14.42,62.6
FOTOA2  (via drill 0.35)
  Top 0.356: G.U1.12 15.72,53.61 v15.74,53.7
  Bottom 0.356: v15.74,53.7 15.74,53.1 15.39,52.74 13.99,52.74 12.1,54.64 G.J3.5
FOTOB1  (via drill 0.35)
  Top 0.356: G.U1.5 13.15,60.78 v13.15,62.6
  Bottom 0.356: G.MOTO1.4 14.63,67.76 14.63,64.12 13.15,62.64 v13.15,62.6
FOTOB2  (via drill 0.35)
  Top 0.356: G.U1.11 v14.45,53.7
  Bottom 0.305: 13.35,54.71 14.36,53.7 v14.45,53.7
  Bottom 0.356: G.J3.4 13.35,54.71
GND
  Bottom 0.356: A.J5.7 58.17,18.89 58.48,19.19 65.56,19.19 65.89,18.86 | A.J5.7 58.17,18.38 | A.J3.7 34.2,18.74 34.31,18.85 | 34.31,18.85 34.58,19.12 41.59,19.12 41.82,18.89 A.J3.1 42.76,17.8 44.87,15.69 A.J8.1 47.46,16.46 48.51,17.51 51.56,17.51 52.54,16.53 A.J8.3 53.04,15.19 54.42,15.19 57.03,17.8 A.J5.7 | A.J3.7 33.21,17.8 32.93,17.52 32.93,10.3 33.06,10.18 A.J4.8 34.2,9.21 34.68,8.73 41.34,8.73 41.82,9.21 | A.J1.1 17.83,18.85 | 17.83,18.85 17.57,19.12 10.42,19.12 10.21,18.91 A.J1.7 9.2,17.8 8.91,17.5 8.91,15.29 | 17.85,9.26 17.83,9.3 A.J2.2 17.83,9.17 17.41,8.75 10.61,8.75 10.21,9.15 A.J2.8 9.2,10.18 8.91,10.47 8.91,12.72 | 8.91,15.29 8.91,12.72 | A.J4.2 41.82,9.21 | A.J6.8 58.17,9.11 58.48,8.8 65.26,8.8 65.79,9.34 A.J6.2 66.76,10.18 67.09,10.51 67.09,17.67 66.96,17.8 A.J5.1 65.79,18.76 65.89,18.86 | A.J6.8 58.17,9.54 | A.J3.7 34.2,18.81 | 34.31,18.85 33.52,19.65 18.63,19.65 17.83,18.85 | A.J12.2 82.21,19.26 | 82.21,19.26 82.21,19.76 66.79,19.76 65.89,18.86 | 91.3,15.18 91.3,17.38 90.86,17.81 A.J12.8 89.83,18.82 89.38,19.26 82.21,19.26 | 91.3,15.18 91.3,10.68 90.82,10.2 A.J11.7 89.82,9.2 89.43,8.81 82.59,8.81 82.2,9.2 A.J11.1 | A.J9.3 45.99,5.04 41.82,9.21 | A.J9.1 52.54,6.35 56.37,10.18 A.J6.8 | 8.9,12.73 8.91,12.72 | A.J15.2 8.89,15.27 8.91,15.29 | A.J16.3 91.39,15.27 91.3,15.18
  pour Bottom (isolate 0.305): 96,4 4,4 4,24 96,24
GND1
  Top 0.356: 12.89,43.93 B.U1.8 12.02,43.96 11.01,44.98 B.C1.2 10.97,45.8 10.97,46.87
  Top 0.61: B.J2.6 8.48,46.85 8.5,46.87 10.97,46.87 12.75,46.87 B.J4.1
  Bottom 0.61: B.J2.6 16.06,46.85 21.44,41.48 21.44,34.34 21.64,34.14 | B.J5.4 23.05,34.14 21.64,34.14 | 21.64,34.14 15.19,34.14 13.49,32.44 10.61,32.44 10.19,32.86 JB3.4
  pour Bottom (isolate 0.305): 4,48 4,28 24,28 24,48
GND2  (via drill 0.35)
  Top 0.305: C.U1.GND2 44.44,45.13 43.15,45.13 43.01,45.27 v43.01,45.62 43.01,45.47 39.48,45.47 v39.01,45 38.88,45.13 37.99,45.13 | v33.04,31.32 32.79,31.07 | C.U1.GND3 | C.J2.6 32.59,46.7 34.16,45.13 37.99,45.13 | C.U1.GND4 37.61,39.62 | 46.41,30.41 C.C1.2 47.41,30.39 47.41,33.88 JP5.4 | 37.99,45.13 37.99,42 | 37.99,42 37.99,41.24 38.73,40.51 C.U1.GND8 | C.U1.GND5 36.72,34.28 33.77,31.32 v33.04,31.32 | v33.04,31.32 43.71,31.32 43.96,31.08 C.U1.GND1 | C.U1.GND9 39.26,40.87 39.82,40.31 39.68,40.31 37.99,42
  Top 0.508: 32.79,31.07 C.U1.GND3 | C.C1.2 45.36,30.39 45.36,30.98 45.26,31.08 C.U1.GND1 44.45,31.11
  Bottom 0.305: C.C3.2 46.28,29.41 | 32.21,37.61 32.21,31.97 32.86,31.32 v33.04,31.32 | 42.99,45.62 v43.01,45.62 43.01,47.15 U$1.SH3 | 33.25,39.46 C.C5.1 34.38,39.49 v34.57,39.68 35.34,39.68 36.48,40.82 36.96,40.82 37.24,40.55 U1.2 37.24,39.2 37.99,38.45 U1.25 37.24,38.65 37.24,39.45 | C.C2.2 C.C4.1 41.77,36.73 41.77,31.34 41.79,31.32 | U$1.A1B12 34.77,42.69 | 34.77,42.69 34.77,42.71 | U$1.SH4 43.06,43.93 42.86,44.14 41.75,44.14 40.77,45.12 39.12,45.12 v39.01,45 34.94,45 34.23,44.29 34.23,42.74 | U$1.SH2 29.64,47.2 C.J2.6 | C.C3.2 46.27,29.49 45.12,29.49 44.95,29.66 44.95,30.68 44.3,31.32 41.79,31.32 | 42.82,43.02 U$1.SH4 | U$1.SH4 42.68,42.64 41.32,42.64 41.22,42.54 U$1.B1A12 | U$1.SH1 33.25,42.69 34.77,42.69 | JP5.4 47.4,33.89 47.4,29.92 46.89,29.41 C.C3.2 | v33.04,31.32 | v33.04,31.32 41.79,31.32
  Bottom 0.406: C.C5.1 33.23,38.62 32.21,37.61
  other vias: 45.97,43.73
  pour Top (isolate 0.305): 28,28 28,48 48,48 48,28
  pour Bottom (isolate 0.305): 28,48 48,48 48,28 28,28
GND3  (via drill 0.35)  (3 unrouted)
  Top 0.254: D.C6.1 57.56,44.99 57.97,45.4 | v54.04,32.42 55.47,31 55.47,28.8 58.94,28.8 59.17,29.03
  Top 0.305: D.LIPOL.1 57.98,46.39 57.97,46.38 57.97,45.4 60.91,42.47 61.9,42.47 64.09,40.29 64.09,36.26 64.04,36.22 64,36.22 | D.U3.6 60.75,36.33 | 64,36.22 61.42,36.22 61.3,36.34 D.U3.6 | D.U3.6 59.1,36.34 v58.91,36.16 | D.C1.1 64,36.22 | D.R2.2 | D.R2.2 D.R5.2 62.2,29.67 v60.82,31.06
  Top 0.61: 54.02,45.77 52.91,46.89 D.J2.6
  Bottom 0.254: 57.65,45.47 57.63,45.48 | 60.15,39.96 59.96,40.16 D.U1.5
  Bottom 0.305: 69.18,31.7 70.99,31.7 70.99,31.69 | v67.72,46.3 67.94,46.3 68.82,45.42 68.82,41.08 68.2,40.47 | D.R4.1 59.08,33.94 59.9,33.11 U$2.SH4 60.82,33.08 v60.82,31.06 60.82,30.72 60.19,30.1 | D.ON/OFF/RESET.P$3 58.25,47.16 D.LIPOL.1 | v57.5,40.2 v57.5,41.26
  Bottom 0.356: 57.98,45.46 D.LIPOL.1 | 57.11,37.58 D.R3.1 57.19,37.52 57.62,37.5 D.C4.1 | U$2.SH3 U$2.SH2 70.99,31.69 U$2.SH1 | 62.15,32.95 62.15,32.21 62.79,31.57 69.05,31.57 69.18,31.7 | 62.15,32.95 62.7,33.5 U$2.B1A12 | 62.15,32.95 61.98,33.11 U$2.SH4 | D.ON/OFF/RESET.P$3 D.ON/OFF/RESET.P$5 D.ON/OFF/RESET.P$2
  Bottom 0.406: 69.87,35.69 69.87,34.48 70.16,34.19 D.J3.4 71.09,34.2 69.32,34.2 U$2.A1B12
  Bottom 0.508: D.C4.1 59.04,37.8 | D.C4.1 59.04,37.82 | 59.04,36.05 D.C4.1 | 58.95,39.96 58.95,39.8 | 59.04,39.71 D.C4.1 | D.R4.1 59.08,36.02 58.93,36.16 v58.91,36.16 59.04,36.28 D.C4.1
  Bottom 0.61: D.LIPOL.1 57.98,45.48 57.63,45.48 54.27,45.48 D.J2.6 | D.U2.GND 66.19,39.99 66.69,40.49 68.17,40.49 68.2,40.47 69.54,39.12 69.54,36.03 69.87,35.69 | 60.31,33.34 60.62,33.34 U$2.SH4 60.72,33.24 | D.J3.4 71.1,33.22 U$2.SH1 | D.C7.1 60.29,45.16 60.01,45.45 57.98,45.45
  Bottom 0.7: 58.95,39.96 60.15,39.96 | 59.04,39.71 58.95,39.8 58.55,40.2 v57.5,40.2
  pour Top (isolate 0.356): 52,48 52,28 72,28 72,48
  pour Bottom (isolate 0.356, rank 3): 52,48 72,48 72,28 52,28
GND4
  Top 0.305: 80.07,45.63 91.77,45.63
  Top 0.356: JP11.3 95.14,36.74 93.51,36.7 | 91.77,45.63 92.74,44.66
  Top 0.61: JP8.3 92.21,38.16 | JP7.6 78.89,46.8 80.07,45.63
  Bottom 0.61: JP11.3 95.15,36.65 95.09,36.7 93.68,36.73 JP8.3 | JP7.6 77.17,46.89 76.86,46.88 JP6.6
  pour Top (isolate 0.305): 76,48 96,48 96,28 76,28
GND5  (via drill 0.35)
  Top 0.356: G.C4.1 20.79,62.95 G.C5.1 21.25,60.89 21.25,60.88 22.95,60.88 G.J2.3 | 19.46,55.63 20.74,55.63 G.C2.1 20.82,54.75 v21.53,54.04
  Top 0.406: G.C2.1 20.82,55.48 20.68,55.34
  Top 0.61: G.C2.1 20.74,55.55 | 19.46,55.63 18.26,55.63 G.U1.14 | G.U2.11 G.U2.10 | G.U2.11 15.97,71.62 15.72,71.87 12.37,71.87 12.16,71.67 G.U2.14 G.U2.15 10.86,70.66 10.86,71.63 10.63,71.86 7.7,71.86 6.72,70.88 | G.U2.11 16,70.6 16,69.58 16.25,69.33 v16.61,69.33 | 6.72,70.88 6.75,70.88 6.75,61.49 v7.01,61.23 | 6.72,70.88 4.92,70.88 G.J1.6
  Bottom 0.305: v21.53,54.04 21.51,54.06 21.51,60.69 21.55,60.73 | v7.03,60.01 7.03,61.21 v7.01,61.23 | v16.61,69.33 17.18,68.76 G.MOTO1.6 18.65,67.78 19.08,68.21 | 9.34,57.7 10.61,57.7 10.82,57.48 G.J3.6 10.82,54.21 9.96,53.34 8.29,53.34
  Bottom 0.356: 9.34,57.7 v7.03,60.01 | 19.01,53.34 21.08,53.34 21.53,53.8 v21.53,54.04 | 19.08,68.21 19.08,68.29 19.02,68.23 | 18.65,67.78 19.71,68.85 19.71,70.66 8.99,70.66
  Bottom 0.61: v7.01,61.23 | 21.64,60.73 G.J2.3
  Bottom 0.813: 19.02,68.23 20.33,68.23 v20.77,67.78 21.3,67.25 21.3,60.98 21.55,60.73 G.J2.3 | 17.2,68.21 17.18,68.19 G.MOTO1.6
  other vias: 6.22,55.97
  pour Top (isolate 0.305): 4,72 4,52 24,52 24,72
  pour Bottom (isolate 0.305): 4,72 4,52 24,52 24,72
GND6
  Top 0.356: H.D1.6 H.D1.5 H.D1.4 41.38,59.84 | 41.38,59.84 41.41,59.84 42.14,60.58 42.14,65.67 41.83,65.99 | 41.84,65.99 41.83,65.99 | JP9.4 43.03,58.19 41.38,59.84 | H.J2.6 36.92,70.89 41.83,65.99
  pour Top (isolate 0.305): 28,72 28,52 48,52 48,72
GND7  (via drill 0.35)
  Top 0.305: 57.2,65.65 56.91,65.93 I.USB.SH4 I.USB.SH3 I.USB.SH2 I.USB.SH1 67.03,66.69 66,66.69 65.82,66.51 65.82,65.75 | v65.19,64.4 65.23,64.42 | I.J2.6 | I.C4.1 68.54,59.96 68.54,60.09 | I.C4.1 68.44,59.81 | 65.15,64.4 v65.19,64.4 | v65.19,64.4 64.3,63.51 62.88,63.51 61.68,62.31 61.58,62.31 | 59.99,56.85 I.U2.P$12 61.16,56.68 I.U2.9 61.16,54.99 62,54.15 H.J4.4 | 61.42,57.64 60.88,58.18 I.U2.P$11 60.66,58.2 60.94,58.48 60.94,59.07 59.85,60.16 v58.46,60.16 58.46,60.23 60.55,62.31 | I.C4.1 67.53,59.86 67.51,59.88 I.C5.1 66.42,60.59 66.17,60.84 62.05,60.84 61.58,61.31 61.58,62.31 | v58.38,64.4 60.47,62.31 60.55,62.31 | I.C4.1 69.38,59.86 69.64,59.6 69.64,58.56 70.01,58.19 | 60.55,62.31 61.58,62.31
  Top 0.406: 57.2,65.65 58.61,65.65 I.USB.B1A12 58.78,64.78 v58.38,64.4 | 65.82,65.75 65.26,65.75 I.USB.A1B12 65.23,64.42 | I.U2.7 59.99,56.85
  Top 0.508: I.USB.SH3 I.J2.6 | I.J3.4 70.01,58.19
  Bottom 0.305: 64.12,61.23 I.C1.2 I.U1.3 | I.U2.P$10 I.U2.P$11 | I.U2.P$13 I.U2.P$12
  Bottom 0.406: I.U1.6 60.14,62.47 59.37,61.69 I.C3.2 59.37,60.66 58.87,60.16 v58.46,60.16 | I.U1.3 63.95,63.44 64.91,64.4 v65.19,64.4
  pour Top (isolate 0.305): 52,72 52,52 72,52 72,72
  pour Bottom (isolate 0.305): 52,72 52,52 72,52 72,72
GND8  (via drill 0.35)
  Bottom 0.305: 77.23,65.75 I.J4.P$28 77.2,67.45 77.48,67.73 v77.86,67.73 | 94.78,65.75 I.J4.P$1 94.75,67.1 v94.12,67.73 90.9,67.73 90.88,67.71 | 88.91,67.72 90.87,67.72 90.88,67.71 | 88.91,67.72 88.22,67.72 | 88.22,67.72 86.3,67.72 | 86.3,67.72 85.69,67.72 | 82.43,67.72 83.02,67.72 83.08,67.66 | 82.43,67.72 81.77,67.72 | 81.77,67.72 81.19,67.72 | 81.19,67.72 80.5,67.72 | 77.88,65.75 I.J4.P$27 77.86,65.74 v77.86,67.73 | I.J4.P$23 80.48,65.75 80.48,67.69 80.5,67.72 | 81.19,67.72 81.13,67.66 81.13,65.75 I.J4.P$22 81.1,64.03 83.06,62.07 84.48,62.07 84.77,61.78 84.77,59.39 | I.J4.P$21 81.78,65.75 81.78,67.71 81.77,67.72 | I.J4.P$20 82.43,65.75 82.43,67.71 82.43,67.72 | 83.08,67.66 83.08,65.75 I.J4.P$19 | I.J4.P$15 85.69,65.76 85.69,67.72 | I.J4.P$14 86.33,65.75 86.33,67.69 86.3,67.72 | I.J4.P$11 88.28,65.75 88.28,67.67 88.22,67.72 | I.J4.P$10 88.93,65.75 88.93,67.7 88.91,67.72 | 90.88,67.71 90.88,65.75 I.J4.P$7 | 84.77,59.39 J.C6.1 J.C5.1 88.07,58.58 90.13,56.51 94.59,56.51 95.1,57.02 I.J5.2 | 84.77,59.39 84.77,59.36 | 83.08,67.66 83.08,67.72 85.69,67.72 | 80.5,67.72 80.49,67.73 v77.86,67.73 | J.C3.1 J.C2.1 J.R1.1 84.77,59.39
  pour Top (isolate 0.305): 76,72 76,52 96,52 96,72
  pour Bottom (isolate 0.305): 76,52 96,52 96,72 76,72
IN+  (via drill 0.35)  (2 unrouted)
  Top 0.61: 58.71,41.05 D.R8.2 | v55.92,42.94 55.86,42.99
  Top 0.813: D.LIPOL.2 55.44,44.77 D.C6.2 55.86,42.99 | v55.92,42.94 58.55,42.94 58.92,42.57 D.R8.2 58.92,39.84 59.88,38.88 D.U3.8
  Bottom 0.305: 55.11,41.92 55.37,41.66 D.U1.9 | 55.92,41.92 v55.92,42.94
  Bottom 0.813: 55.11,41.92 55.92,41.92
  other vias: 57.47,42.97
  pour Bottom (isolate 0.356, no thermals): 54.7,41.51 56.16,41.51 56.91,42.26 58.03,42.26 58.03,43.48 57.67,43.84 54.22,43.84 54.7,43.36
IN-  (via drill 0.35)
  Top 0.61: 62.62,37.25 v62.62,37.15
  Top 0.813: D.R8.1 61.95,40.84 62.33,40.46 62.33,37.48 62.62,37.18 v62.62,37.15 62.17,37.61 D.U3.7
  Bottom 0.813: D.T1.D 62.61,38.72 62.61,37.17 v62.62,37.15
INA1
  Top 0.356: G.U1.3 15.72,59.55 15.21,59.04 10.21,59.04 9.75,59.49 9.75,62.88 10.9,64.02 G.U2.2
INA2  (via drill 0.35)
  Top 0.356: G.U1.13 17.01,55.58 17.01,56.81 16.53,57.29 9.62,57.29 8.13,58.79 8.13,63.73 v8.43,64.08 | G.U2.6 15.95,64.6 15.95,62.7 v15.92,62.6
  Bottom 0.356: v15.92,62.6 15.92,62.43 15.15,61.66 10.78,61.66 8.4,64.04 v8.43,64.08
INB1
  Top 0.356: G.U2.3 12.15,64.15 10.66,62.66 10.66,60.78 G.U1.7
INB2
  Top 0.356: 17.45,64.43 G.U2.7 17.24,62.37 16.96,62.09 16.96,60.78 G.U1.2
M_V
  Top 0.305: 18.5,65.87 18.51,65.87
  Top 0.813: G.U2.8 18.5,64.78 18.57,64.72 G.C4.2 20.87,64.74 21.53,64.74 23,63.27 G.J2.2 | 18.5,65.87 17.18,67.2 14.88,67.2 13.43,65.75 G.U2.4 | G.U2.8 18.51,64.73 | 18.51,65.87 G.U2.8
MA1  (via drill 0.35)
  Top 0.61: G.U2.16 9.62,68.64 v9.19,68.21
  Bottom 0.61: 12.59,65.51 G.C3.1 | v9.19,68.21 9.3,68.21 10.35,69.25 11.83,69.25 12.17,68.92 12.15,68.89 G.MOTO1.2 12.15,65.92 G.C3.1 | 12.5,65.68 G.C3.1
MA2  (via drill 0.35)
  Top 0.61: v7.82,65.14 8.63,65.95 10.88,65.95 14.7,69.77 G.U2.12
  Bottom 0.61: v7.82,65.14 7.37,64.69 7.37,63.62 10.17,60.82 12.25,60.82 14.66,58.41 G.C1.1 15.81,58.31 15.81,56.25 G.J3.2
MB1  (via drill 0.35)
  Top 0.61: v9.75,67.05 10.58,67.05 13.43,69.89 G.U2.13
  Bottom 0.61: G.C3.2 10.86,65.92 10.86,67.09 10.9,67.11 G.MOTO1.1 10.86,66.99 9.8,66.99 v9.75,67.05
MB2  (via drill 0.35)
  Top 0.61: v19.25,66.84 v19.24,66.84 18.51,67.57 G.U2.9
  Bottom 0.61: v19.25,66.84 20.23,65.87 20.23,61.83 17.61,59.21 G.C1.2 17.61,57.77 17.15,57.32 17.15,56.28 G.J3.1
N$1
  Bottom 0.254: U$1.A7 U1.4
  Bottom 0.305: U$1.A7 | U$1.A7
N$2
  Bottom 0.254: U1.3 | U1.3 U$1.A6
N$3
  Bottom 0.61: D.U2.VOUT 67.14,43.31 67.53,43.7 D.L1.1
N$4
  Bottom 0.356: D.R6.2 54.93,33.56 | 54.85,33.81 D.R6.2 | D.R6.2 55.18,33.14 56.42,31.91 D.D1.1
N$5
  Bottom 0.356: D.R7.2 65.28,37.56 65.28,39.12 D.U2.SHDN 65.24,40.23 66.1,41.1 66.1,46.4 66.12,46.48 D.ON/OFF/RESET.P$1 D.ON/OFF/RESET.P$4
N$6  (via drill 0.35)
  Top 0.305: D.R5.1 64.14,31.39 v64.14,32.5
  Bottom 0.305: U$2.B5 64.17,32.69 v64.14,32.5
N$7  (via drill 0.35)
  Top 0.305: v67.17,32.5 67.17,31.4 D.R2.1
  Bottom 0.305: U$2.A5 v67.17,32.5
N$8
  Bottom 0.254: D.U1.6 55.47,40.08 D.R3.2
N$10  (via drill 0.35)
  Top 0.305: v57.85,38.91 57.68,38.74 57.68,31.28 56.63,30.23 D.R9.2
  Bottom 0.305: v57.85,38.91 56.64,38.91 56.47,39.08 56.47,40.86 56.19,41.15 56.16,41.15 56.15,41.16 D.U1.8
N$12
  Bottom 0.61: JP7.5 78.3,44.42 76.86,44.36 JP6.5
N$14
  Bottom 0.61: JP7.4 76.89,41.75 JP6.4
N$15
  Bottom 0.61: JP7.3 77.17,39.27 76.86,39.26 JP6.3
N$16
  Bottom 0.61: JP7.2 77.17,36.73 76.86,36.72 JP6.2
N$17
  Bottom 0.61: JP7.1 77.14,34.19 JP6.1
N$18
  Bottom 0.61: JP11.5 95.1,31.57 93.71,31.56 JP8.5
N$19
  Bottom 0.61: JP8.2 93.67,39.2 95.14,39.22 JP11.2
N$20
  Bottom 0.61: JP11.1 93.59,41.79 93.52,41.85 93.47,41.81 93.48,41.77 JP8.1
N$21
  Top 0.356: H.D1.2 38.08,65.76 37.66,66.18 33.67,66.18 H.R2.2
N$22
  Top 0.356: 39.88,64.29 H.D1.1 39.83,65.79 37.66,67.95 34.02,67.95 H.R1.2
N$23
  Top 0.356: H.D1.3 36.18,64.39 33.93,64.39 H.R3.2
N$24
  Top 0.356: H.R1.1 31.64,67.98 29.3,67.98 H.J2.5
N$25
  Top 0.356: H.J2.4 29.3,66.2 H.R2.1
N$26
  Top 0.356: H.R3.1 31.67,64.39 30.27,64.39 H.J2.3
N$27
  Bottom 0.305: I.U1.16 66.49,70.37 66.45,70.41 56.79,70.41 52.9,66.52 I.J2.4
N$28
  Bottom 0.305: I.U1.15 65.22,69.8 57.07,69.8 54.42,67.16 54.42,65.5 52.9,63.98 I.J2.3
N$29  (via drill 0.35)
  Top 0.305: v62.17,67.4 62.26,67.4 I.USB.A6 62.26,64.78 62.09,64.61 61.48,64.61 61.26,64.83 I.USB.B6
  Bottom 0.305: I.U1.12 61.41,68.16 v62.17,67.4
N$30  (via drill 0.35)
  Top 0.305: I.USB.A7 61.76,66.64 61,67.38 v60.72,67.38 60.92,67.38 61.78,68.24 62.49,68.24 63,67.72 63,67.03 62.76,66.76 I.USB.B7
  Bottom 0.305: v60.72,67.38 60.14,67.95 I.U1.11
N$31  (via drill 0.35)
  Top 0.508: I.USB.A4B9 64.46,64.91 63.95,64.39 v63.69,64.39 | I.USB.B4A9 59.56,64.63 59.56,64.6 v59.78,64.38
  Bottom 0.305: 61.41,63.42 I.U1.5 61.41,64.35 | 61.41,64.35 61.38,64.38 | 61.46,64.39 61.41,64.35
  Bottom 0.406: I.U1.5 61.41,62.3 61.06,61.95 I.C3.1
  Bottom 0.508: v63.69,64.39 61.46,64.39 | 61.38,64.38 v59.78,64.38
N$32
  Bottom 0.305: I.U1.2 65.25,63.07 65.25,61.95 65.75,61.44 65.98,61.44 65.95,61.42 | I.C8.1 64.07,57.99 65.2,59.12 65.2,60.82 65.8,61.42 65.95,61.42 | I.C6.1 65.95,61.42
N$33  (via drill 0.35)
  Top 0.305: v69.85,56.91 69.85,56.95 I.C9.1
  Bottom 0.305: I.C7.1 68.67,62.18 67.76,63.09 I.U1.1 | I.C7.1 68.67,61.28 | I.C7.1 69.45,61.42 69.75,61.12 69.75,56.91 v69.85,56.91
N$34
  Top 0.305: I.U2.2 63.4,56.9 65.48,56.9 66.04,57.45 66.04,58.21 65.63,58.62 64.72,58.62 | 64.72,59.55 I.C5.2 | I.C5.2 64.73,59.52 | I.C5.2 64.72,58.62 | 64.72,58.62 64.26,58.16 I.U2.4
N$35  (via drill 0.35)
  Top 0.305: v65.2,57.83 64.88,57.51 I.U2.3
  Bottom 0.305: I.R2.2 I.R1.2 65.8,56.26 65.2,56.86 v65.2,57.83
N$36
  Bottom 0.305: I.C6.2 I.R1.1
N$37
  Bottom 0.305: I.C7.2 I.R2.1
N$38
  Bottom 0.305: I.J4.P$24 79.8,64.45 82.58,61.67 82.58,61.36 82.85,61.09 J.R1.2
N$39
  Bottom 0.305: I.J4.P$25 79.15,64.06 81.47,61.75 J.C2.2
N$40
  Bottom 0.305: 92.14,59.54 92.29,59.39 J.C1.2 93.17,59.39 93.53,59.76 93.53,62.7 94.1,63.26 I.J4.P$2
N$41
  Bottom 0.305: I.J4.P$3 93.48,65.7 93.48,63.6 92.42,62.53 J.C1.1
N$42
  Bottom 0.305: J.C4.2 90.92,59.39 91.33,59.8 91.33,62.37 92.8,63.84 I.J4.P$4
N$43
  Bottom 0.305: I.J4.P$5 92.15,64.14 90.23,62.22 J.C4.1
N$44
  Bottom 0.305: I.J4.P$26 78.5,63.72 79.26,62.97 J.C3.2
P0
  Top 0.305: 54.51,38.88 D.U3.1 | D.J2.4 52.9,41.52
  Top 0.356: 54.51,38.88 54.3,39.09 54.3,40.13 52.9,41.52
P1
  Top 0.305: D.J2.3 52.9,39.16
  Top 0.356: 52.9,39.16 54.41,37.65 55.31,37.65 D.U3.2
P4
  Bottom 0.305: D.R1.2 D.R6.1 55.13,35.57 54.57,35.57 54.26,35.88 54.26,42.7 52.9,44.06 D.J2.5 53.06,44.52 57.85,44.52 58.66,43.7 58.66,41.49 59,41.16 D.U1.3
PA1  (via drill 0.35)
  Top 0.305: J.J1.3 81.99,63.27 v82.54,63.8
  Bottom 0.305: J.R2.1 86.44,63.83 86.95,64.35 I.J4.P$13
  Bottom 0.356: v82.54,63.8 83.67,62.78 86.11,62.78 J.R2.1
PA3  (via drill 0.35)
  Top 0.356: B.U1.7 11.96,42.69 v10.57,44.07
  Bottom 0.305: v10.57,44.07 10.52,44.12 4.9,44.12 B.J2.5
PA6
  Top 0.305: B.J2.4 5.98,42.69 B.U1.2
PA7
  Top 0.305: B.J2.3 4.9,39.23 4.9,39.71 6.6,41.41 7.12,41.41 7.13,41.42 B.U1.3
POWER  (via drill 0.35)
  Top 0.356: G.U1.6 11.91,62.6 v11.93,62.6
  Bottom 0.356: v11.93,62.6 | v11.93,62.6 8.43,66.11 7.33,66.11 6.53,65.3 6.53,63.26 9.8,59.98 11.88,59.98 14.6,57.27 G.J3.3 | v11.93,62.6 | G.MOTO1.3 13.48,67.69 13.48,64.25 11.93,62.7 v11.93,62.6
PROG  (via drill 0.35)
  Top 0.305: C.U1.IO0 31.82,44.08 31.83,44.09 32.36,44.09 32.62,43.83 32.62,38.87 34.92,36.57 34.92,35.09 v35.45,34.56
  Bottom 0.254: 36.03,38.66 U1.23 35.46,38.65 | C.R4.1 C.R4.2
  Bottom 0.305: 35.46,38.65 35.16,38.65 33.25,36.74 33.25,33.51 33.44,33.32 33.91,33.32 C.R4.1 | v35.45,34.56 35.83,34.23 C.R4.2
RESET  (via drill 0.35)
  Top 0.305: C.U1.EN 40.66,33.07 v40.64,33.1
  Bottom 0.254: U1.19 35.71,36.65 | C.R3.1 C.R3.2
  Bottom 0.305: 35.71,36.65 35.51,36.45 35.51,35.73 37.46,33.79 C.R3.2 | v40.64,33.1 C.R3.1
RX  (via drill 0.35)
  Top 0.305: C.U1.TXD0 31.51,34.06 33.6,34.06 34.06,34.52 v34.1,34.52
  Bottom 0.254: U1.20 35.39,37.15
  Bottom 0.305: 34.29,34.52 v34.1,34.52 34.28,34.52 34.92,35.16 34.92,36.68 35.39,37.15
SCL
  Top 0.305: 37.93,11.45 38.01,11.45 A.J4.4 40.55,11.45
  Top 0.356: 37.93,11.45 35.49,11.45 34.22,12.72 A.J4.7 | A.J4.7 34.2,12.66 | A.J6.7 59.44,13.99 59.44,16.54 A.J5.5 | 64.52,11.45 A.J6.4 61.98,11.45 59.69,11.45 58.41,12.72 A.J6.7 | 65.79,15.24 A.J5.2 | 64.52,11.45 64.52,13.97 65.48,14.93 65.75,14.93 65.79,14.96 A.J5.2 | A.J12.4 86.02,16.55 88.58,16.55 89.36,15.76 89.36,15.74 A.J12.7 88.55,14 88.55,11.47 A.J11.5 87.28,10.22 86.03,11.47 83.47,11.47 A.J11.2 80.9,11.45 64.52,11.45 | A.J1.2 16.56,13.99 16.56,11.43 | 16.56,11.43 15.31,10.18 A.J2.4 15.29,10.19 14.04,11.45 11.48,11.45 A.J2.7 | A.J1.5 11.48,16.53 11.48,13.92 10.28,12.72 A.J2.7 | A.J3.2 40.55,13.99 40.55,11.45 56.9,11.45 A.J6.7 | A.J3.5 36.74,17.05 35.47,15.78 35.47,13.99 A.J4.7 | 16.56,11.43 17.29,11.43 17.31,11.45 27.03,11.45 A.J7.2 31.66,15.19 31.8,15.19 34.2,12.79 A.J4.7 | A.J14.1 68.33,15.36 65.89,15.36 A.J5.2 | A.J13.2 69.87,6.52 91.43,6.52 A.J16.1 | A.J15.4 6.15,10.19 8.68,12.72 A.J2.7
  Bottom 0.356: A.J13.2 69.02,5.68 69.01,5.77 69.01,15.01 69.02,15.01 A.J14.1 | A.J7.2 31.14,15.17 31.14,5.6 A.J10.1
SCL1
  Top 0.356: B.U1.5 11.54,40.15 10.18,38.79 JB3.2
  Bottom 0.356: B.J2.1 4.9,34.4 7.23,36.73 JB3.2 11.58,38.12 13.86,38.12 14.09,37.89 16.43,37.89 B.J4.3
SCL2
  Top 0.305: C.U1.IO22 30.66,33.08 29.74,34 C.J2.1
  Bottom 0.305: C.R1.1 29.14,34.16 C.J2.1
SCL3
  Top 0.356: D.U3.4 53.78,35.07 D.J2.1
SCL4
  Top 0.356: G.U1.9 11.9,54.3 11.55,53.95 9.89,53.95 5.69,58.15 G.J1.1
SCL5  (via drill 0.35)
  Top 0.305: J.J1.1 76.9,58.49 80.43,62.02 83.33,62.02 85,63.7 v85,63.8
  Bottom 0.305: I.J4.P$16 85,63.91 v85,63.8
SDA
  Top 0.356: A.J14.2 70.85,15.69 69.18,14.01 67.09,14.01 A.J6.1 | A.J3.8 34.2,15.47 32.45,17.23 30.6,17.23 29.12,15.75 A.J7.1 | A.J15.3 7.69,12.73 A.J1.8
  Bottom 0.356: 12.78,10.18 A.J2.6 | A.J4.6 36.69,10.18 35.47,11.39 35.47,14.01 34.22,15.26 A.J3.8 34.2,15.27 35.45,16.53 38.01,16.53 A.J3.3 39.28,17.79 40.55,16.52 40.55,13.99 A.J4.1 55.63,12.72 A.J5.8 58.2,15.26 59.47,16.53 61.98,16.53 A.J5.3 64.52,16.53 64.52,14.07 65.79,12.8 A.J6.1 64.52,11.45 61.98,11.45 A.J6.6 | A.J12.6 88.56,16.55 88.56,14.06 89.82,12.8 A.J11.8 88.55,11.47 86.02,11.47 A.J11.3 83.47,11.47 83.47,14.02 A.J12.1 82.21,15.3 81.82,15.69 A.J14.2 70.25,15.07 70.25,5.68 A.J13.1 87.58,5.02 95.1,12.54 A.J16.2 | A.J1.3 14.02,16.53 11.47,16.53 10.21,15.27 A.J1.8 11.48,13.99 11.48,11.43 12.74,10.18 A.J2.6 | A.J2.6 14.02,11.45 16.53,11.45 17.8,12.72 A.J2.1 29.79,12.72 29.8,12.72 | A.J10.2 29.8,5.67 29.8,12.72 | 29.8,12.72 29.8,15.02 A.J7.1
SDA1
  Top 0.305: B.J2.2 4.9,37.02 7.46,39.58 B.U1.4
  Bottom 0.305: 15.01,41.75 9.63,41.75
  Bottom 0.356: 15.01,41.75 15.21,41.75 B.J4.2 15.27,42.12 16.43,43.27 18.44,43.27 19.2,42.51 19.2,38.57 17.72,37.09 15.22,37.09 12.73,34.6 JB3.3 | 9.63,41.75 8.15,41.75 6.22,39.82 6.22,38.72 4.9,37.4 B.J2.2
SDA2
  Top 0.305: C.U1.IO21 29.6,36.08 C.J2.2
  Bottom 0.305: C.R2.1 31.15,39.22 29.14,37.21 C.J2.2
SDA3
  Top 0.305: D.U3.3
  Top 0.356: D.U3.3 53.28,36.35 D.J2.2
SDA4
  Top 0.356: G.U1.8 9.82,55.55 4.9,60.48 G.J1.2
SDA5  (via drill 0.35)
  Top 0.305: J.J1.2 76.92,60.73 78.86,62.66 82.7,62.66 83.83,63.78 v83.83,63.8
  Bottom 0.305: I.J4.P$17 I.J4.P$18 83.7,63.93 v83.83,63.8
SDCLK
  Bottom 0.305: I.U1.9 55.44,66.53 I.J1.1
SDDAT
  Bottom 0.305: I.U1.8 57.6,60.82 55.44,58.66 I.J1.3
SHTDOWN
  Top 0.305: 63.7,56.2 I.U2.1 63.39,56.23 66.26,56.23 66.7,55.79 I.R3.1 66.7,54.6 65,52.9 H.J4.3
TX  (via drill 0.35)
  Top 0.305: C.U1.RXD0 32.85,35.09 33.99,36.22 v34.1,36.2
  Bottom 0.254: U1.21 35.04,37.65
  Bottom 0.305: 35.04,37.65 34.03,36.64 34.02,36.21 v34.1,36.2
UPDI
  Top 0.356: B.U1.6 12.83,41.39 11.78,41.39 8.81,38.41 8.81,33.42 10.58,31.65 B.J5.5
  Bottom 0.305: B.J5.5 20.5,31.65
UPDI1
  Top 0.356: 13.1,55.48 G.U1.10 13.18,53.52 13.93,52.77 14.6,52.77 | 14.6,52.77 21.66,52.77 23.1,54.21 G.J2.5 | 14.6,52.77
VBAT
  Top 0.61: JP1.2 31.65,23.1 33.3,21.45 35.08,21.45 JP2.2 55.65,23.1 57.28,21.47 59.1,21.47 JP3.2 79.65,23.1 81.28,21.47 83.15,21.47 84.73,23.06 JP4.2
VBATF
  Top 0.813: D.F2.2 68.64,40.72 69.6,40.72 71.05,39.27 D.J3.2
VCC
  Top 0.356: A.J2.5 A.J1.6 A.J1.4 16.56,16.53 16.56,18.46 17.78,19.68 | A.J2.5 | A.J2.5 A.J2.3 | A.J5.6 A.J5.4 | A.J5.4 A.J6.3 A.J6.5 | A.J3.6 A.J4.5 A.J4.3 A.J3.4 39.28,16 40.55,17.27 40.55,18.32 40.44,18.43 | A.J11.4 A.J11.6 A.J12.5 A.J12.3 83.48,16.55 | 83.48,16.55 81.68,16.55 78.48,19.74 | A.J5.4 63.25,16 64.52,17.27 64.52,18.32 | 17.78,19.68 39.19,19.68 40.44,18.43 | 40.44,18.43 40.66,18.43 41.79,19.57 44.9,19.57 44.94,19.53 50,19.53 | 64.52,18.32 63.31,19.53 50,19.53 | 64.52,18.32 65.94,19.74 78.48,19.74 | A.J8.2 50,19.53 | 83.48,16.55 83.48,18.34 84.22,19.09 90.35,19.09 91.1,18.34 91.1,9.68 89.89,8.48 52.29,8.48 50,6.18 A.J9.2 | A.J15.1 4.9,18.98 4.91,19 5.59,19.68 17.78,19.68 | A.J16.4 95.08,17.84 95.08,19.06 93.62,20.52 79.26,20.52 78.48,19.74
  pour Top (isolate 0.305): 4,24 96,24 96,4 4,4
VCC1
  Top 0.305: C.C1.1 46.48,32.17
  Top 0.406: 44.5,32.06 C.U1.3V3 | JP5.3 47.1,36.41 45.74,35.05 45.74,33.16 46.41,32.49 C.C1.1
  Top 0.508: C.C1.1 46.38,32.06 44.5,32.06
  Bottom 0.254: U1.6 39.37,39.98
  Bottom 0.305: 47.1,36.97 JP5.3 | C.R2.2 31.08,41.19 | C.R1.2 31.18,37.77 31.18,37.76 32.18,38.76 32.18,41.01 32,41.19 C.R2.2 | 44.3,38.64 C.C2.1 | 42.09,40.8 42.11,40.81 42.1,40.82 | 42.09,40.8 42.09,41.38 42.75,42.04 44.18,42.04 44.32,42.18 44.32,43.81 43.45,44.67 42.5,44.67 41.24,45.94 33.51,45.94 31.21,43.63 31.21,41.23 C.R2.2 | 42.09,40.8 42.09,40.78 | 39.37,39.98 39.37,40.33
  Bottom 0.406: C.C3.1 46.35,32.66 45.73,33.28 45.73,35.36 45.8,35.44 45.8,35.46 47.08,36.73 JP5.3
  Bottom 0.508: 47.1,36.97 45.6,38.46 44.46,38.46 C.C2.1 42.11,40.81 39.85,40.81 39.37,40.33
VCC2  (via drill 0.35)
  Top 0.305: 20.82,58.19 20.79,58.22 G.C5.2
  Top 0.356: G.C2.2 20.82,58.19
  Top 0.508: 9.78,64.47 G.U2.1 9.62,63.87 8.94,63.18 8.94,59.14 9.87,58.21 16.84,58.21 18.26,59.62 | G.U1.1 18.23,60.78 18.23,62.62 v18.26,62.65 | G.U2.5 14.71,65.41 15.28,65.99 v16.66,65.99 | G.U1.1 18.26,59.77 | G.U1.1 18.26,59.62 | G.J2.4 20.82,58.19 19.69,58.19 18.26,59.62 | G.C2.2 20.79,57.28
  Bottom 0.508: v18.26,62.65 18.26,64.49 16.76,65.99 v16.66,65.99
VCC3  (via drill 0.35)
  Top 0.305: I.R3.2 65.11,55.21
  Top 0.406: I.U2.6 57.91,57.51 57.27,56.86 v57.27,56.63
  Top 0.508: I.J3.3 70.07,61.76 I.C4.2 68.34,61.66 v62.65,61.66 | 65.11,55.21 65.09,55.18 v62.78,55.18
  Bottom 0.305: 62.76,59.75 63.9,59.75 I.C1.1
  Bottom 0.508: I.U1.4 62.68,61.82 62.65,61.79 v62.65,61.66 | 62.62,61.63 v62.65,61.66 | v57.27,56.63 57.27,56.66 60.85,60.24 62.7,60.24 | v62.78,55.18 62.78,55.34 62.7,55.41 62.7,59.76 | v62.65,61.66 62.7,61.61 62.7,60.24 | 62.7,60.24 62.7,59.76 | 62.78,59.73 62.76,59.75 | 62.7,59.76 63.89,59.76 I.C1.1
VCC4  (via drill 0.35)
  Top 0.356: D.C1.2 64.01,34.61 | D.D1.2 59.13,34.35 59.85,35.07 D.U3.5
  Top 0.406: D.U3.5 62.85,35.07 63.36,34.57 D.C1.2 66.56,34.57 D.F1.1
  Top 0.61: v63.36,42.55 63.36,42.45 65.01,40.8 65.01,37.28 66.57,35.72 D.F1.1
  Bottom 0.356: D.D1.2 58.48,31.91 57.21,33.17 D.R1.1 | v63.36,42.55
  Bottom 0.61: D.L1.2 64.73,43.51 65.24,43 D.U2.BP | 64.26,44.56 D.L1.2 | D.C7.2 63.59,44.58 | 63.59,44.58 64.24,44.58 D.L1.2 | 63.36,42.62 63.36,44.34 63.59,44.58 | 63.36,42.62 | v63.36,42.55 63.36,42.62
VDD1
  Bottom 0.61: 95.05,34.18 95.06,34.18 JP11.4 95.12,34.24 JP8.4 92.42,35.45
  pour Bottom (isolate 0.305): 76,48 96,48 96,28 76,28
VDD2
  pour Bottom (isolate 0.305): 28,72 28,52 48,52 48,72
VDD3
  Bottom 0.356: I.J4.P$6 91.5,64.43 91.12,64.05 90.23,64.05 | I.J4.P$12 87.6,64.37 87.92,64.05 87.93,64.05 | 87.93,64.05 89.55,64.05 | 89.55,64.05 90.23,64.05 | I.J4.P$9 89.55,64.05 | I.J4.P$8 90.2,64.08 90.23,64.05 | 87.93,64.05 87.93,63.31 J.R2.2 87.89,62.87 87.89,61.27 J.C5.2 | J.C5.2 J.C6.2 | J.C5.2 88.77,61.09 89.16,60.7 89.16,58.68 89.63,58.2 93.02,58.2 95.1,60.29 I.J5.1
VMOT  (via drill 0.35)
  Top 0.813: D.F2.1 68.39,38.78 v68.39,37.53
  Bottom 0.305: D.U2.VIN 67.27,39.02
  Bottom 0.356: 67.19,39.01 67.14,39.06 D.U2.VIN
  Bottom 0.61: 67.25,37.58 D.R7.1 67.03,37.36
  Bottom 0.813: 67.03,37.36 67.03,36.49 66.78,36.23 64.29,36.23 63.98,36.54 63.98,40.54 D.T1.S | 67.27,39.02 67.27,37.56 67.32,37.51 68.38,37.51 v68.39,37.53 67.31,37.53 67.25,37.58
VO+
  Top 0.406: I.U2.5 58.94,58.18 57.47,58.18 56.3,57.01 56.3,56.26 56.92,55.64 H.J4.6
VO-
  Top 0.406: H.J4.5 58.76,53.6 58.76,56 I.U2.8
VOUTL
  Top 0.305: I.C9.2 68.54,53.97 H.J4.1
VOUTR
  Bottom 0.305: H.J4.2 67.08,53.79 64.58,56.29 I.C8.2
VUSB
  Bottom 0.61: JP4.1 63.16,23.1 61.51,21.45 59.95,21.45 58.3,23.1 JP3.1 39.16,23.1 37.51,21.45 35.92,21.45 34.27,23.1 JP2.1 15.16,23.1 13.56,21.5 11.9,21.5 10.3,23.1 JP1.1
VUSB1  (via drill 0.35)
  Top 0.61: v39.34,43.45 39.34,43.65 | 42.13,41.14 42.13,40.09 v41.85,39.81
  Top 0.813: 39.34,43.65 40.34,44.66 41.5,44.66 42.13,44.04 42.13,41.14 v43.07,41.14
  Bottom 0.254: U1.8 40.02,38.65 39.79,38.88 39.79,38.91 39.79,39 U1.7
  Bottom 0.305: U$1.A4B9 35.6,42.05 | C.C5.2 33.57,40.85 | 35.54,42.88 U$1.A4B9 | v43.07,41.14 43.08,41.15 | 41.6,38.98 41.52,38.91 41.52,38.18 C.C4.2 41.8,38.56 41.8,39.75 v41.85,39.81 | U$1.B4A9 40.44,42.43 40.42,42.45 40.42,42.88 | U$1.A4B9 35.52,42.09
  Bottom 0.508: 36.11,43.45 35.54,42.88 | 40.42,42.88 39.85,43.45 | v41.85,39.81 41.85,39.09 41.66,38.91 39.79,38.91
  Bottom 0.61: 36.11,43.45 v39.34,43.45 39.85,43.45 | 35.52,42.09 35.52,41.09 35.28,40.85 33.57,40.85 | v43.07,41.14 43.1,41.1
  Bottom 0.813: JP5.1 46.4,41.1 43.1,41.1
VUSB2  (via drill 0.35)
  Top 0.813: v68.34,36.19 68.01,36.19 66.99,37.2 66.99,41.84 67.37,42.22 70.69,42.22 D.J3.1
  Bottom 0.305: 59.52,41.92 59.5,41.9 | 59.52,41.92 59.78,41.66 D.U1.2 | 59.52,41.92 59.75,42.16 D.U1.1
  Bottom 0.356: 60.74,38.78 D.C4.2
  Bottom 0.508: 63.45,34.01 63.45,35.02 63.45,35.22 | 63.48,35.28 68.23,35.28
  Bottom 0.61: 60.87,37.72 D.C4.2 60.77,37.57 | D.T1.G 61.68,41.07 | v68.34,36.19 68.36,36.18 | 60.88,35.35 60.77,35.25 D.R4.2 | 63.32,35.35 63.45,35.22 | U$2.B4A9 63.47,35 | 63.47,35 63.47,35.26 63.48,35.28 | 68.23,35.28 68.36,35.14 68.37,35.13 U$2.A4B9 | 63.45,35.02 63.47,35
  Bottom 0.813: D.R4.2 60.74,34.86 D.C4.2 60.74,38.99 61.34,39.59 61.34,40.6 D.T1.G 61.68,41.62 61.38,41.92 59.52,41.92 | 68.36,36.18 68.36,35.14 | 63.32,35.35 60.88,35.35
  pour Bottom (isolate 0.305, no thermals): 58.97,43.59 62.61,43.59 62.63,43.57 62.63,42.31 62.29,41.97 62.29,40.28 62.01,40 61.07,40 60.73,40.34 60.73,41.12 60.44,41.4 59.22,41.4 58.97,41.65

## Text on the board
tPlace: sound M.1 | motor M.1 | disp M.1 | RGB M.1 | proto | power M.1 | M.1
bPlace: GND | + | − | PA3 | PA6 | VUSB | PA7 | VBAT | SDA | 3V3 | SCL | GND | UPDI | adapter M.1 | main M.1 | base M.1
bNames: 1 | 2